# Altium PCB Power_Clock_proto.PcbDoc
Units mil, origin at the board's own origin, x right, y up, seen from the top; angles counter-clockwise.
Board outline 5200 x 2700 mil, 2 copper layers (Top Layer, Bottom Layer), stack 61.756 mil thick; 18 components, 9 nets, 565 pads, 0 vias.
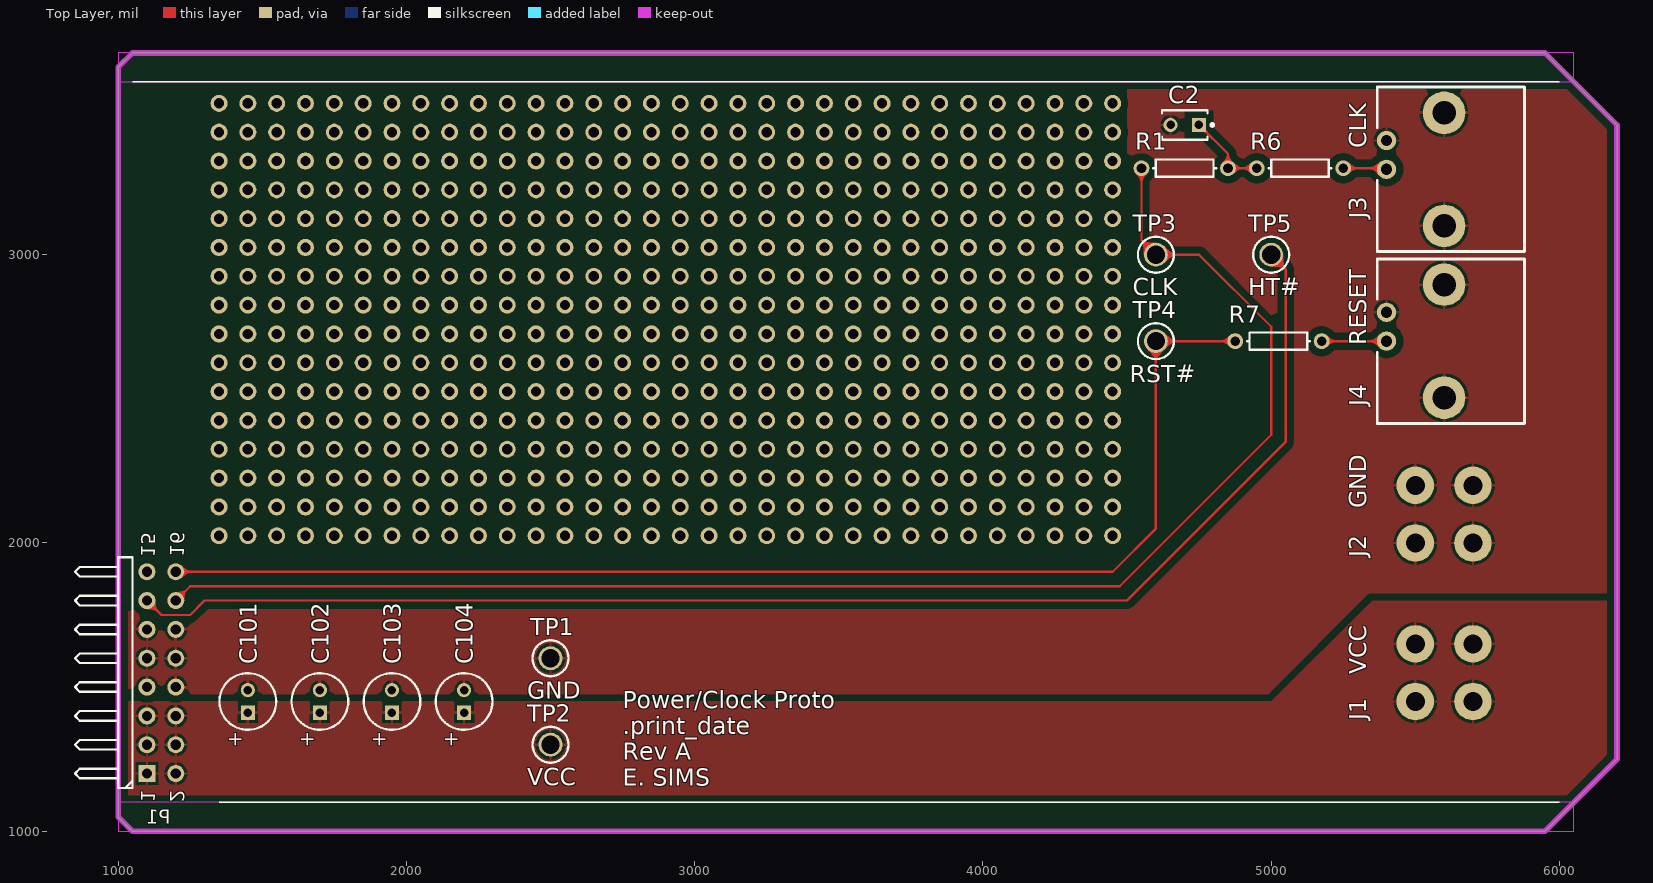
[diagram p0: Top Layer view]
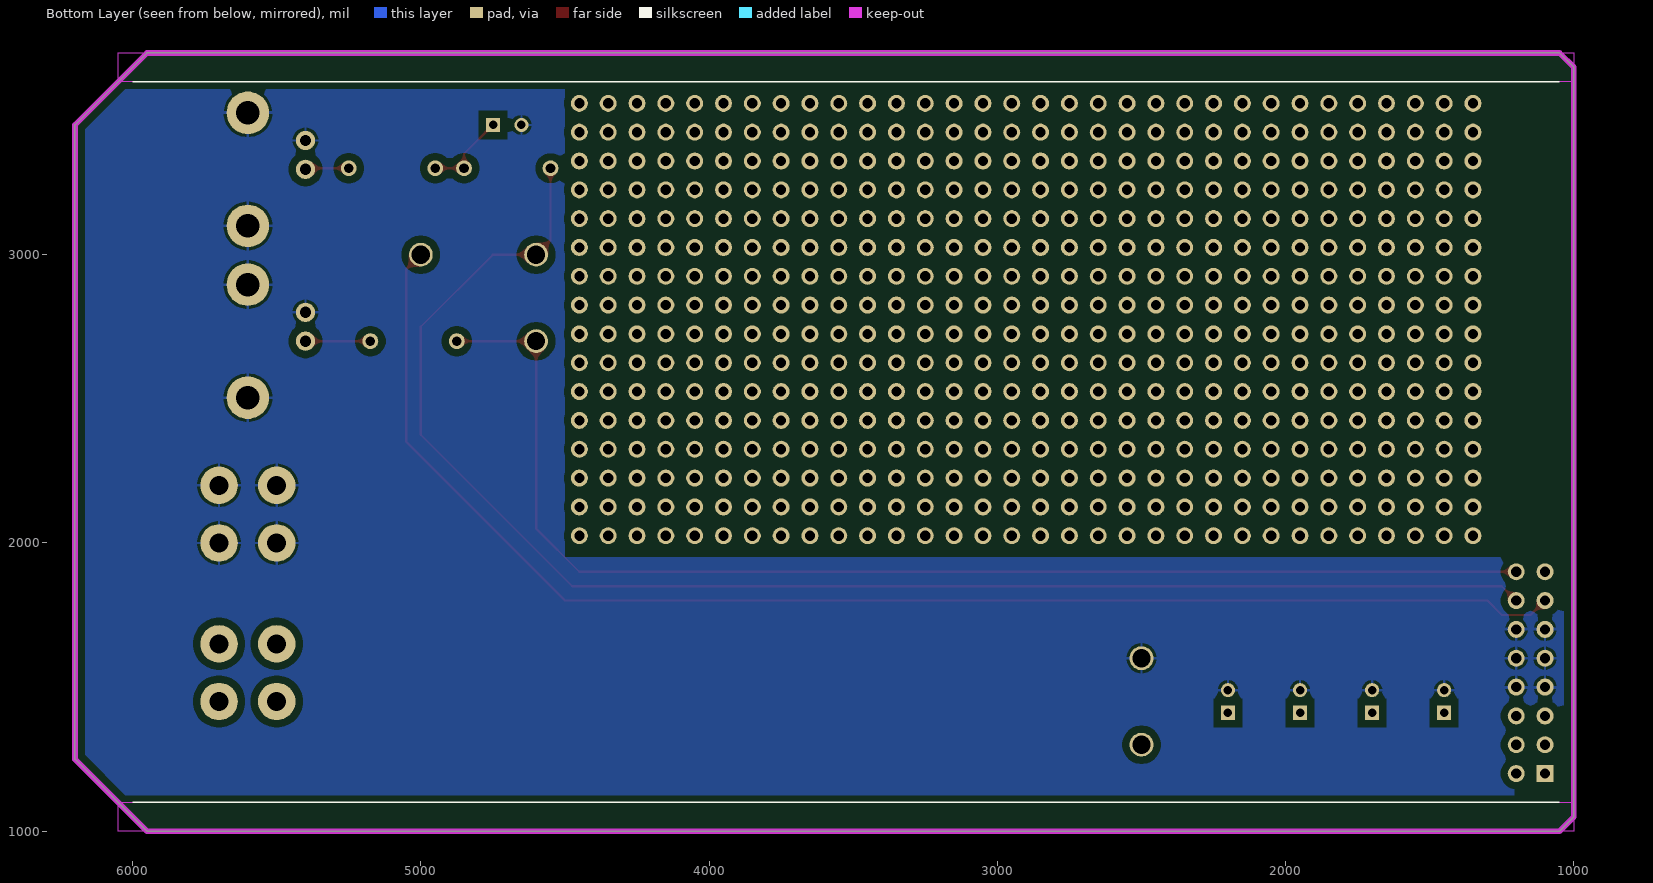
[diagram p1: Bottom Layer view, seen from below]

## Layer stack, top to bottom
Top Solder: solder mask 1, SM-001, Dk 4
Top Layer: signal copper 1.378
Dielectric 1: core 59, Core-043, Dk 4.3
Bottom Layer: signal copper 1.378
Bottom Solder: solder mask 1, SM-001, Dk 4

## Board outline
1000,1050 1050,1000 5950,1000 6200,1250 6200,3450 5950,3700 1050,3700 1000,3650

## Design rules (kind name [scope] priority, off if disabled: settings)
Clearance Clearance_Poly [InPoly] p1: gap=25 ignorepadtopadclearanceinfootprint=FALSE
Clearance [All] p2: gap=8 ignorepadtopadclearanceinfootprint=FALSE
Height Height_Bottom [OnBottom] p1: minheight=0 maxheight=100 prefheight=0
Height Height_Top [OnTop] p2: minheight=0 maxheight=635 prefheight=0
HoleSize [All] p1: absolutevalues=TRUE maxlimit=120 minlimit=1 maxpercent=80.000 minpercent=20.000
PolygonConnect [All] p1: thpad.connectstyle=Relief thpad.reliefconductorwidth=10 thpad.reliefentries=4 thpad.polygonreliefangle="90 Angle" thpad.airgapwidth=10 smdpad.connectstyle=Relief smdpad.reliefconductorwidth=10 smdpad.reliefentries=4 smdpad.polygonreliefangle="90 Angle" smdpad.airgapwidth=10 via.connectstyle=Direct via.reliefconductorwidth=10 via.reliefentries=4 via.polygonreliefangle="90 Angle" via.airgapwidth=10
RoutingVias "Schematic Routing Via Style_1" [InNetClass('PWR')] p1: holewidth=20 width=35 viastyle="Through Hole" minholewidth=20 minwidth=35 maxholewidth=20 maxwidth=50
RoutingVias [All] p2: holewidth=10 width=20 viastyle="Through Hole" minholewidth=10 minwidth=20 maxholewidth=10 maxwidth=20
SilkToSilkClearance [All] p1: silktosilkclearance=5
SilkToSolderMaskClearance [IsPad] p1: minsilkscreentomaskgap=5 clearancetoexposedcopper=TRUE
SolderMaskExpansion [All] p1: expansion=4 istentingtop=FALSE
Width "Schematic Width Constraint_1" [InNetClass('PWR')] p1: maxlimit=50 minlimit=20 preferedwidth=20
Width [All] p2: maxlimit=8 minlimit=8 preferedwidth=8
26 further rules are at their usual default settings.

## Classes and differential pairs
component class Sheet1: C2 C101 C102 C104 J1 J2 J3 J4 P1 R1 R6 TP2 TP3 TP4 TP5
net class PWR: GND VCC

## Components (designator, comment, footprint, x,y, rotation, side; value= is the part's Value field where it differs from the comment)
C2 "K104K15X7RF5TL2" VISH-K104K15X7RF5TL2 4700,3450 r180 top
C101 "Cap Pol5" C5x7 1450,1450 r90 top value=10uF
C102 "Cap Pol5" C5x7 1700,1450 r90 top value=10uF
C103 "Cap Pol5" C5x7 1950,1450 r90 top value=10uF
C104 "Cap Pol5" C5x7 2200,1450 r90 top value=10uF
J1 "VCC" CT3151SP-2 5600,1550 r270 top
J2 "GND" CT3151SP-0 5600,2100 r270 top
J3 "CLK" "BNC R/A" 5600,3296.06 r90 top
J4 "RESET" "BNC R/A" 5600,2700 r90 top
P1 "Header 8X2H" HDR2X8H 1100,1200 r90 top
R1 "Res1" AXIAL-0.3 4700,3300 r180 top value=100
R6 "Res1" AXIAL-0.3 5100,3300 r180 top value=50
R7 "Res1" AXIAL-0.3 5025,2700 r180 top value=100
TP1 "GND" KSTN-5011_V 2500,1600 r0 top
TP2 "VCC" KSTN-5011_V 2500,1300 r0 top
TP3 "CLK" KSTN-5011_V 4600,3000 r0 top
TP4 "RST#" KSTN-5011_V 4600,2700 r0 top
TP5 "HT#" KSTN-5011_V 5000,3000 r0 top

## Footprints (in the part's own frame and the unit in brackets; to place one, negate y for a bottom-side part, rotate by r counter-clockwise, add the part's x,y. Pads: shape width x height; smd on the part's side, far side on the other; paste and mask are expansions set on the pad)
AXIAL-0.3 [mm] "Axial Device, Thru-Hole; 2 Leads; 0.3 in Pin Spacing"
  round 1.4 hole 0.85: 1(-3.81,0) 2(3.81,0)
  silkscreen extent -2.77,-0.76 2.77,0.76
"BNC R/A" [mm]
  round 1.7 hole 1: 1(0,5.08) 2(2.54,5.08)
  round 3.75 hole 2.05: MNT(-4.98,0) MNT(4.98,0)
  silkscreen extent -7.25,-7.09 7.25,5.89, body extent -7.25,-28.6 7.25,5.89, height 11.5
C5x7 [mm] "Capacitor; 2 Leads"
  rect 1.25x1.25 hole 0.75: 1(-1,0)
  round 1.25 hole 0.75: 2(1,0)
  silkscreen extent -2.5,-2.5 2.5,2.5, body extent -2.5,-2.5 2.5,2.5, height 7
CT3151SP-0 [mil]
  round 130 hole 66: 1(-100,100) 1(-100,-100) 1(100,100) 1(100,-100)
  body extent -266,-128 266,962, height 566
CT3151SP-2 [mil]
  round 130 hole 66: 1(-100,100) 1(-100,-100) 1(100,100) 1(100,-100)
  body extent -266,-128 266,962, height 566
HDR2X8H [mm] "Connector; Header; 8x2 Position; Right Angle"
  rect 1.5x1.5 hole 0.9: 1(0,0)
  round 1.5 hole 0.9: 2(0,-2.54) 3(2.54,0) 4(2.54,-2.54) 5(5.08,0) 6(5.08,-2.54) 7(7.62,0) 8(7.62,-2.54) 9(10.16,0) 10(10.16,-2.54) 11(12.7,0) 12(12.7,-2.54) 13(15.24,0) 14(15.24,-2.54) 15(17.78,0) 16(17.78,-2.54)
  silkscreen extent -1.27,1.27 19.05,6.35
KSTN-5011_V [mm] "Test Point, Dia 3.17mm"
  round 2.1 hole 1.6: 1(0,0)
  silkscreen extent -1.59,-1.58 1.59,1.58, body extent -1.59,-1.59 1.59,1.59, height 8.13
VISH-K104K15X7RF5TL2 [mm] "THD, 2-Leads, Body 4x2.6mm"
  rect 1.25x1.25 hole 0.75: 1(-1.25,0)
  round 1.25 hole 0.75: 2(1.25,0)
  silkscreen extent -2.55,-1.3 2,1.3, body extent -2,-1.3 2,1.3, height 5.6

## Part data
C2: library part CMP-2000-06508-1, "Ceramic Capacitor, 100 nF, +/- 10%, 50 V, -55 to 125 degC, 2-Pin THD, RoHS, Tape and Reel", Capacitance=0.1µF, Manufacturer=Vishay, Operating Temperature=-55°C~125°C, Package / Case=Radial, Package Description="2-Pin Through Hole Device, Body 4 x 2.6 mm", Ratings=-, Standard Package=1, Temperature Coefficient=X7R, Tolerance=±10%, Voltage - Rated=50V, Applications=GeneralPurpose, Catalog Drawings=Mono-KapSide2-15_5.58Mono-KapSide1_15, Category=Capacitors, Datasheet URL=http://www.vishay.com/docs/45171/kseries.pdf, Datasheet Version=08/2013, Family=CeramicCapacitors, Features=-, Height - Seated (Max)="0.220\"(5.58mm)", Lead Spacing="0.098\"(2.50mm)", Lead Style=Straight, Manufacturer URL=http://www.vishay.com/, Mounting Technology=ThroughHole, Mounting Type=ThroughHole, Online Catalog=Mono-Kap™Series, Other Names=BC1084CT, Package Reference=K104K15X7RF5TL2, Packaging=CutTape(CT), Series=Mono-Kap™K, Size / Dimension="0.157\"Lx0.098\"W(4.00mmx2.50mm)", Thickness (Max)=-
C101 C102 C103 C104: "Polarized Capacitor", LatestRevisionDate=17-Jul-2002, LatestRevisionNote="Re-released for DXP Platform.", PackageDescription="Polarized Capacitor; 2 Leads", PackageReference=POLAR0.8, Published=8-Jun-2000, Publisher="Altium Limited"
J1: library part CT3151SP-2, "CONN BANANA JACK SOLDER RED", Unit Price (USD)=2.05
J2: library part CT3151SP-0, "CONN BANANA JACK SOLDER BLACK", Unit Price (USD)=2.05
J3 J4: library part RF
P1: "Header, 8-Pin, Dual row, Right Angle", LatestRevisionDate=17-Jul-2002, LatestRevisionNote="Re-released for DXP Platform.", Publisher="Altium Limited", System=Connector
R1 R6 R7: "Resistor", LatestRevisionDate=17-Jul-2002, LatestRevisionNote="Re-released for DXP Platform.", PackageDescription="Axial Device, Thru-Hole; 2 Leads; 0.3 in Pin Spacing", PackageReference=AXIAL-0.3, Published=8-Jun-2000, Publisher="Altium Limited"
TP1 TP2 TP3 TP4 TP5: library part TP

## Free pads (board coordinates)
  round 59.06 hole 35.43: 0(1350,2025) 0(1350,2125) 0(1350,2225) 0(1350,2325) 0(1350,2425) 0(1350,2525) 0(1350,2625) 0(1350,2725) 0(1350,2825) 0(1350,2925) 0(1350,3025) 0(1350,3125) 0(1350,3225) 0(1350,3325) 0(1350,3425) 0(1350,3525) 0(1450,2025) 0(1450,2125) 0(1450,2225) 0(1450,2325) 0(1450,2425) 0(1450,2525) 0(1450,2625) 0(1450,2725) 0(1450,2825) 0(1450,2925) 0(1450,3025) 0(1450,3125) 0(1450,3225) 0(1450,3325) 0(1450,3425) 0(1450,3525) 0(1550,2025) 0(1550,2125) 0(1550,2225) 0(1550,2325) 0(1550,2425) 0(1550,2525) 0(1550,2625) 0(1550,2725) 0(1550,2825) 0(1550,2925) 0(1550,3025) 0(1550,3125) 0(1550,3225) 0(1550,3325) 0(1550,3425) 0(1550,3525) 0(1650,2025) 0(1650,2125) 0(1650,2225) 0(1650,2325) 0(1650,2425) 0(1650,2525) 0(1650,2625) 0(1650,2725) 0(1650,2825) 0(1650,2925) 0(1650,3025) 0(1650,3125) 0(1650,3225) 0(1650,3325) 0(1650,3425) 0(1650,3525) 0(1750,2025) 0(1750,2125) 0(1750,2225) 0(1750,2325) 0(1750,2425) 0(1750,2525) 0(1750,2625) 0(1750,2725) 0(1750,2825) 0(1750,2925) 0(1750,3025) 0(1750,3125) 0(1750,3225) 0(1750,3325) 0(1750,3425) 0(1750,3525) 0(1850,2025) 0(1850,2125) 0(1850,2225) 0(1850,2325) 0(1850,2425) 0(1850,2525) 0(1850,2625) 0(1850,2725) 0(1850,2825) 0(1850,2925) 0(1850,3025) 0(1850,3125) 0(1850,3225) 0(1850,3325) 0(1850,3425) 0(1850,3525) 0(1950,2025) 0(1950,2125) 0(1950,2225) 0(1950,2325) 0(1950,2425) 0(1950,2525) 0(1950,2625) 0(1950,2725) 0(1950,2825) 0(1950,2925) 0(1950,3025) 0(1950,3125) 0(1950,3225) 0(1950,3325) 0(1950,3425) 0(1950,3525) 0(2050,2025) 0(2050,2125) 0(2050,2225) 0(2050,2325) 0(2050,2425) 0(2050,2525) 0(2050,2625) 0(2050,2725) 0(2050,2825) 0(2050,2925) 0(2050,3025) 0(2050,3125) 0(2050,3225) 0(2050,3325) 0(2050,3425) 0(2050,3525) 0(2150,2025) 0(2150,2125) 0(2150,2225) 0(2150,2325) 0(2150,2425) 0(2150,2525) 0(2150,2625) 0(2150,2725) 0(2150,2825) 0(2150,2925) 0(2150,3025) 0(2150,3125) 0(2150,3225) 0(2150,3325) 0(2150,3425) 0(2150,3525) 0(2250,2025) 0(2250,2125) 0(2250,2225) 0(2250,2325) 0(2250,2425) 0(2250,2525) 0(2250,2625) 0(2250,2725) 0(2250,2825) 0(2250,2925) 0(2250,3025) 0(2250,3125) 0(2250,3225) 0(2250,3325) 0(2250,3425) 0(2250,3525) 0(2350,2025) 0(2350,2125) 0(2350,2225) 0(2350,2325) 0(2350,2425) 0(2350,2525) 0(2350,2625) 0(2350,2725) 0(2350,2825) 0(2350,2925) 0(2350,3025) 0(2350,3125) 0(2350,3225) 0(2350,3325) 0(2350,3425) 0(2350,3525) 0(2450,2025) 0(2450,2125) 0(2450,2225) 0(2450,2325) 0(2450,2425) 0(2450,2525) 0(2450,2625) 0(2450,2725) 0(2450,2825) 0(2450,2925) 0(2450,3025) 0(2450,3125) 0(2450,3225) 0(2450,3325) 0(2450,3425) 0(2450,3525) 0(2550,2025) 0(2550,2125) 0(2550,2225) 0(2550,2325) 0(2550,2425) 0(2550,2525) 0(2550,2625) 0(2550,2725) 0(2550,2825) 0(2550,2925) 0(2550,3025) 0(2550,3125) 0(2550,3225) 0(2550,3325) 0(2550,3425) 0(2550,3525) 0(2650,2025) 0(2650,2125) 0(2650,2225) 0(2650,2325) 0(2650,2425) 0(2650,2525) 0(2650,2625) 0(2650,2725) 0(2650,2825) 0(2650,2925) 0(2650,3025) 0(2650,3125) 0(2650,3225) 0(2650,3325) 0(2650,3425) 0(2650,3525) 0(2750,2025) 0(2750,2125) 0(2750,2225) 0(2750,2325) 0(2750,2425) 0(2750,2525) 0(2750,2625) 0(2750,2725) 0(2750,2825) 0(2750,2925) 0(2750,3025) 0(2750,3125) 0(2750,3225) 0(2750,3325) 0(2750,3425) 0(2750,3525) 0(2850,2025) 0(2850,2125) 0(2850,2225) 0(2850,2325) 0(2850,2425) 0(2850,2525) 0(2850,2625) 0(2850,2725) 0(2850,2825) 0(2850,2925) 0(2850,3025) 0(2850,3125) 0(2850,3225) 0(2850,3325) 0(2850,3425) 0(2850,3525) 0(2950,2025) 0(2950,2125) 0(2950,2225) 0(2950,2325) 0(2950,2425) 0(2950,2525) 0(2950,2625) 0(2950,2725) 0(2950,2825) 0(2950,2925) 0(2950,3025) 0(2950,3125) 0(2950,3225) 0(2950,3325) 0(2950,3425) 0(2950,3525) 0(3050,2025) 0(3050,2125) 0(3050,2225) 0(3050,2325) 0(3050,2425) 0(3050,2525) 0(3050,2625) 0(3050,2725) 0(3050,2825) 0(3050,2925) 0(3050,3025) 0(3050,3125) 0(3050,3225) 0(3050,3325) 0(3050,3425) 0(3050,3525) 0(3150,2025) 0(3150,2125) 0(3150,2225) 0(3150,2325) 0(3150,2425) 0(3150,2525) 0(3150,2625) 0(3150,2725) 0(3150,2825) 0(3150,2925) 0(3150,3025) 0(3150,3125) 0(3150,3225) 0(3150,3325) 0(3150,3425) 0(3150,3525) 0(3250,2025) 0(3250,2125) 0(3250,2225) 0(3250,2325) 0(3250,2425) 0(3250,2525) 0(3250,2625) 0(3250,2725) 0(3250,2825) 0(3250,2925) 0(3250,3025) 0(3250,3125) 0(3250,3225) 0(3250,3325) 0(3250,3425) 0(3250,3525) 0(3350,2025) 0(3350,2125) 0(3350,2225) 0(3350,2325) 0(3350,2425) 0(3350,2525) 0(3350,2625) 0(3350,2725) 0(3350,2825) 0(3350,2925) 0(3350,3025) 0(3350,3125) 0(3350,3225) 0(3350,3325) 0(3350,3425) 0(3350,3525) 0(3450,2025) 0(3450,2125) 0(3450,2225) 0(3450,2325) 0(3450,2425) 0(3450,2525) 0(3450,2625) 0(3450,2725) 0(3450,2825) 0(3450,2925) 0(3450,3025) 0(3450,3125) 0(3450,3225) 0(3450,3325) 0(3450,3425) 0(3450,3525) 0(3550,2025) 0(3550,2125) 0(3550,2225) 0(3550,2325) 0(3550,2425) 0(3550,2525) 0(3550,2625) 0(3550,2725) 0(3550,2825) 0(3550,2925) 0(3550,3025) 0(3550,3125) 0(3550,3225) 0(3550,3325) 0(3550,3425) 0(3550,3525) 0(3650,2025) 0(3650,2125) 0(3650,2225) 0(3650,2325) 0(3650,2425) 0(3650,2525) 0(3650,2625) 0(3650,2725) 0(3650,2825) 0(3650,2925) 0(3650,3025) 0(3650,3125) 0(3650,3225) 0(3650,3325) 0(3650,3425) 0(3650,3525) 0(3750,2025) 0(3750,2125) 0(3750,2225) 0(3750,2325) 0(3750,2425) 0(3750,2525) 0(3750,2625) 0(3750,2725) 0(3750,2825) 0(3750,2925) 0(3750,3025) 0(3750,3125) 0(3750,3225) 0(3750,3325) 0(3750,3425) 0(3750,3525) 0(3850,2025) 0(3850,2125) 0(3850,2225) 0(3850,2325) 0(3850,2425) 0(3850,2525) 0(3850,2625) 0(3850,2725) 0(3850,2825) 0(3850,2925) 0(3850,3025) 0(3850,3125) 0(3850,3225) 0(3850,3325) 0(3850,3425) 0(3850,3525) 0(3950,2025) 0(3950,2125) 0(3950,2225) 0(3950,2325) 0(3950,2425) 0(3950,2525) 0(3950,2625) 0(3950,2725) 0(3950,2825) 0(3950,2925) 0(3950,3025) 0(3950,3125) 0(3950,3225) 0(3950,3325) 0(3950,3425) 0(3950,3525) 0(4050,2025) 0(4050,2125) 0(4050,2225) 0(4050,2325) 0(4050,2425) 0(4050,2525) 0(4050,2625) 0(4050,2725) 0(4050,2825) 0(4050,2925) 0(4050,3025) 0(4050,3125) 0(4050,3225) 0(4050,3325) 0(4050,3425) 0(4050,3525) 0(4150,2025) 0(4150,2125) 0(4150,2225) 0(4150,2325) 0(4150,2425) 0(4150,2525) 0(4150,2625) 0(4150,2725) 0(4150,2825) 0(4150,2925) 0(4150,3025) 0(4150,3125) 0(4150,3225) 0(4150,3325) 0(4150,3425) 0(4150,3525) 0(4250,2025) 0(4250,2125) 0(4250,2225) 0(4250,2325) 0(4250,2425) 0(4250,2525) 0(4250,2625) 0(4250,2725) 0(4250,2825) 0(4250,2925) 0(4250,3025) 0(4250,3125) 0(4250,3225) 0(4250,3325) 0(4250,3425) 0(4250,3525) 0(4350,2025) 0(4350,2125) 0(4350,2225) 0(4350,2325) 0(4350,2425) 0(4350,2525) 0(4350,2625) 0(4350,2725) 0(4350,2825) 0(4350,2925) 0(4350,3025) 0(4350,3125) 0(4350,3225) 0(4350,3325) 0(4350,3425) 0(4350,3525) 0(4450,2025) 0(4450,2125) 0(4450,2225) 0(4450,2325) 0(4450,2425) 0(4450,2525) 0(4450,2625) 0(4450,2725) 0(4450,2825) 0(4450,2925) 0(4450,3025) 0(4450,3125) 0(4450,3225) 0(4450,3325) 0(4450,3425) 0(4450,3525)

## Nets (pads, with @x,y where several pads share a name; then routed paths per layer and width w, separated by ;. In a path a pad name is that pad's centre, name@x,y a point inside that pad or via, vN(x,y) a via of type N, cw(c..) or ccw(c..) an arc to the next point about the centre after c; other vN are vias at no path point)
CLK: P1.14 R1.2 TP3.1 | length 5237.4
  Top Layer w8: P1.14 1250,1850 4475,1850 5000,2375 5000,2750 4750,3000 TP3.1 4550,3050 R1.2
DBG: P1.15
GND: C2.2 C101.2 C102.2 C103.2 C104.2 J2.1 J3.2 J3.MNT J4.2 J4.MNT P1.7 P1.8 P1.9 P1.10 P1.11 P1.12 TP1.1
HT#: P1.13 TP5.1 | length 4889.9
  Top Layer w8: P1.13 1150,1750 1250,1750 1300,1800 4500,1800 5050,2350 5050,2950 TP5.1
NetC2_1: C2.1 R1.1 R6.2 | length 291.4
  Top Layer w8: C2.1@4750,3450 4850,3350 R1.1 R6.2
NetJ3_1: J3.1 R6.1 | length 151.6
  Top Layer w8: R6.1 5396.06,3300 J3.1
NetJ4_1: J4.1 R7.1 | length 225
  Top Layer w8: R7.1 J4.1
RST#: P1.16 R7.2 TP4.1 | length 4387.1
  Top Layer w8: P1.16 4450,1900 4600,2050 TP4.1 R7.2
VCC: C101.1 C102.1 C103.1 C104.1 J1.1 P1.1 P1.2 P1.3 P1.4 P1.5 P1.6 TP2.1

## Polygon pours and split planes (outlines as drawn)
GND on Top Layer "GND_L01_P001" (solid, remove dead copper, pour order 1): 1000,1400 6200,1400 6200,3700 1000,3700
VCC on Top Layer "VCC_L01_P000" (solid, remove dead copper, pour order 0): 6200,1100 6200,1800 5350,1800 5000,1450 1000,1450 1000,1100
GND on Bottom Layer "GND_L02_P002" (solid, remove dead copper, pour order 2): 1000,1000 6200,1000 6200,3700 1000,3700

## Keep-outs
Top Layer:
  rectangle: 1000,3600 6050,3700
  rectangle: 1000,1000 6050,1100
Bottom Layer:
  rectangle: 1000,1000 6050,1100
  rectangle: 1000,3600 6050,3700
Keep-Out Layer:
  the board outline again, w20

## Other copper
Top Layer:
  pour cut-out: 1000,3700 1000,1950 4500,1950 4500,3700
Bottom Layer:
  pour cut-out: 1000,3700 1000,1950 4500,1950 4500,3700

## Silkscreen, mask and mechanical layers (free items; w line width, h text height)
Top Overlay:
  lines w5: 1050,3600 6000,3600 ; 1350,1100 6000,1100
  text "Power/Clock Proto / .print_date / Rev A / E. SIMS" at 2750,1157.09 h60
Bottom Overlay:
  lines w5: 1050,1100 6000,1100 ; 1050,3600 6000,3600

## Text inside footprints (layer, text, board x,y; h text height)
C101: Top Overlay "+" at 1385.64,1346.66 h50 r270
C102: Top Overlay "+" at 1635.64,1346.66 h50 r270
C103: Top Overlay "+" at 1885.64,1346.66 h50 r270
C104: Top Overlay "+" at 2135.64,1346.66 h50 r270
P1: Top Overlay "16" at 1180,1951.65 h50 r270; Top Overlay "2" at 1180,1100 h50 r270; Top Overlay "1" at 1080,1100 h50 r270; Top Overlay "15" at 1080,1950.74 h50 r270